# EAGLE board aux power systems1.1 (EAGLE 6.5.0)

Size 100 x 80 mm. Coordinates in mm from the lower left corner, seen from the top.
Outline: 0,0 100,0 100,80 0,80 0,0
Copper layers (1*16): Top 0.035mm / dielectric 1.5mm / Bottom 0.035mm
Design rules "default": minimum track width 10mil, minimum drill 24mil, track to track 8mil, track to pad 8mil, pad to pad 8mil, via to via 8mil, smd to smd 8mil, copper to edge 40mil, drill to drill 8mil, minimum pad ring 10mil, minimum via ring 8mil, stop-mask expansion 4mil, vias tented up to drill 0mil, thermal gap 10mil

## Footprints (pad centres in the part's own frame; a part is rotated, then mirrored left to right if it is on the bottom)
0603 = smd 1.1 x 1: 1 -0.85,0; 2 0.85,0
RELAY-G5Q = drill 1.3: 1 8.89,3.81; 2 -1.27,3.81; 3 -8.89,3.81; 4 -6.35,-3.81; 5 8.89,-3.81
SOT363 = smd 0.3 x 0.99: 1 -0.65,-0.8; 2 0,-0.8; 3 0.65,-0.8; 4 0.65,0.81; 5 0,0.81; 6 -0.65,0.81

## Placement (x,y rotation side)
F1  PTC0603  [0603]  -36.83,36.83 0 top  (outside the outline)
U$2  RELAYPTH  [RELAY-G5Q]  -24.13,6.35 0 top  (outside the outline)
U$3  RELAYPTH  [RELAY-G5Q]  -45.72,6.35 0 top  (outside the outline)
U$4  RELAYPTH  [RELAY-G5Q]  -24.13,17.78 0 top  (outside the outline)
U$9  BC847PN  [SOT363]  -40.64,36.83 0 top  (outside the outline)
U$13  BC847PN  [SOT363]  -15.24,48.26 0 top  (outside the outline)
U$15  BC847PN  [SOT363]  -22.86,48.26 0 top  (outside the outline)

## Library data of the parts
F1 = SparkFun-PowerIC
U$2-U$4 = SparkFun-Electromechanical
U$9 U$13 U$15 = SparkFun-DiscreteSemi

## Nets
5V: U$9.3 U$13.3 U$15.3
AGND: U$2.5 U$4.1
B$2: U$2.3 U$3.3 U$4.3
B$3: U$2.2
N$1: U$3.5 U$9.4
N$2: U$4.5 U$13.4
N$3: U$2.1 U$15.4
N$6: F1.1 F1.2
N$8: U$3.2 U$4.2
N$11: U$3.1

## Tracks (layer width: path | path; a pad name or v marks a point on that pad's centre or on a via)
5V  (2 unrouted)
AGND  (1 unrouted)
B$2  (2 unrouted)
N$1  (1 unrouted)
N$2  (1 unrouted)
N$3  (1 unrouted)
N$6  (1 unrouted)
N$8  (1 unrouted)